# EAGLE board board-Panel (EAGLE 9.6.2), part 1 of 2
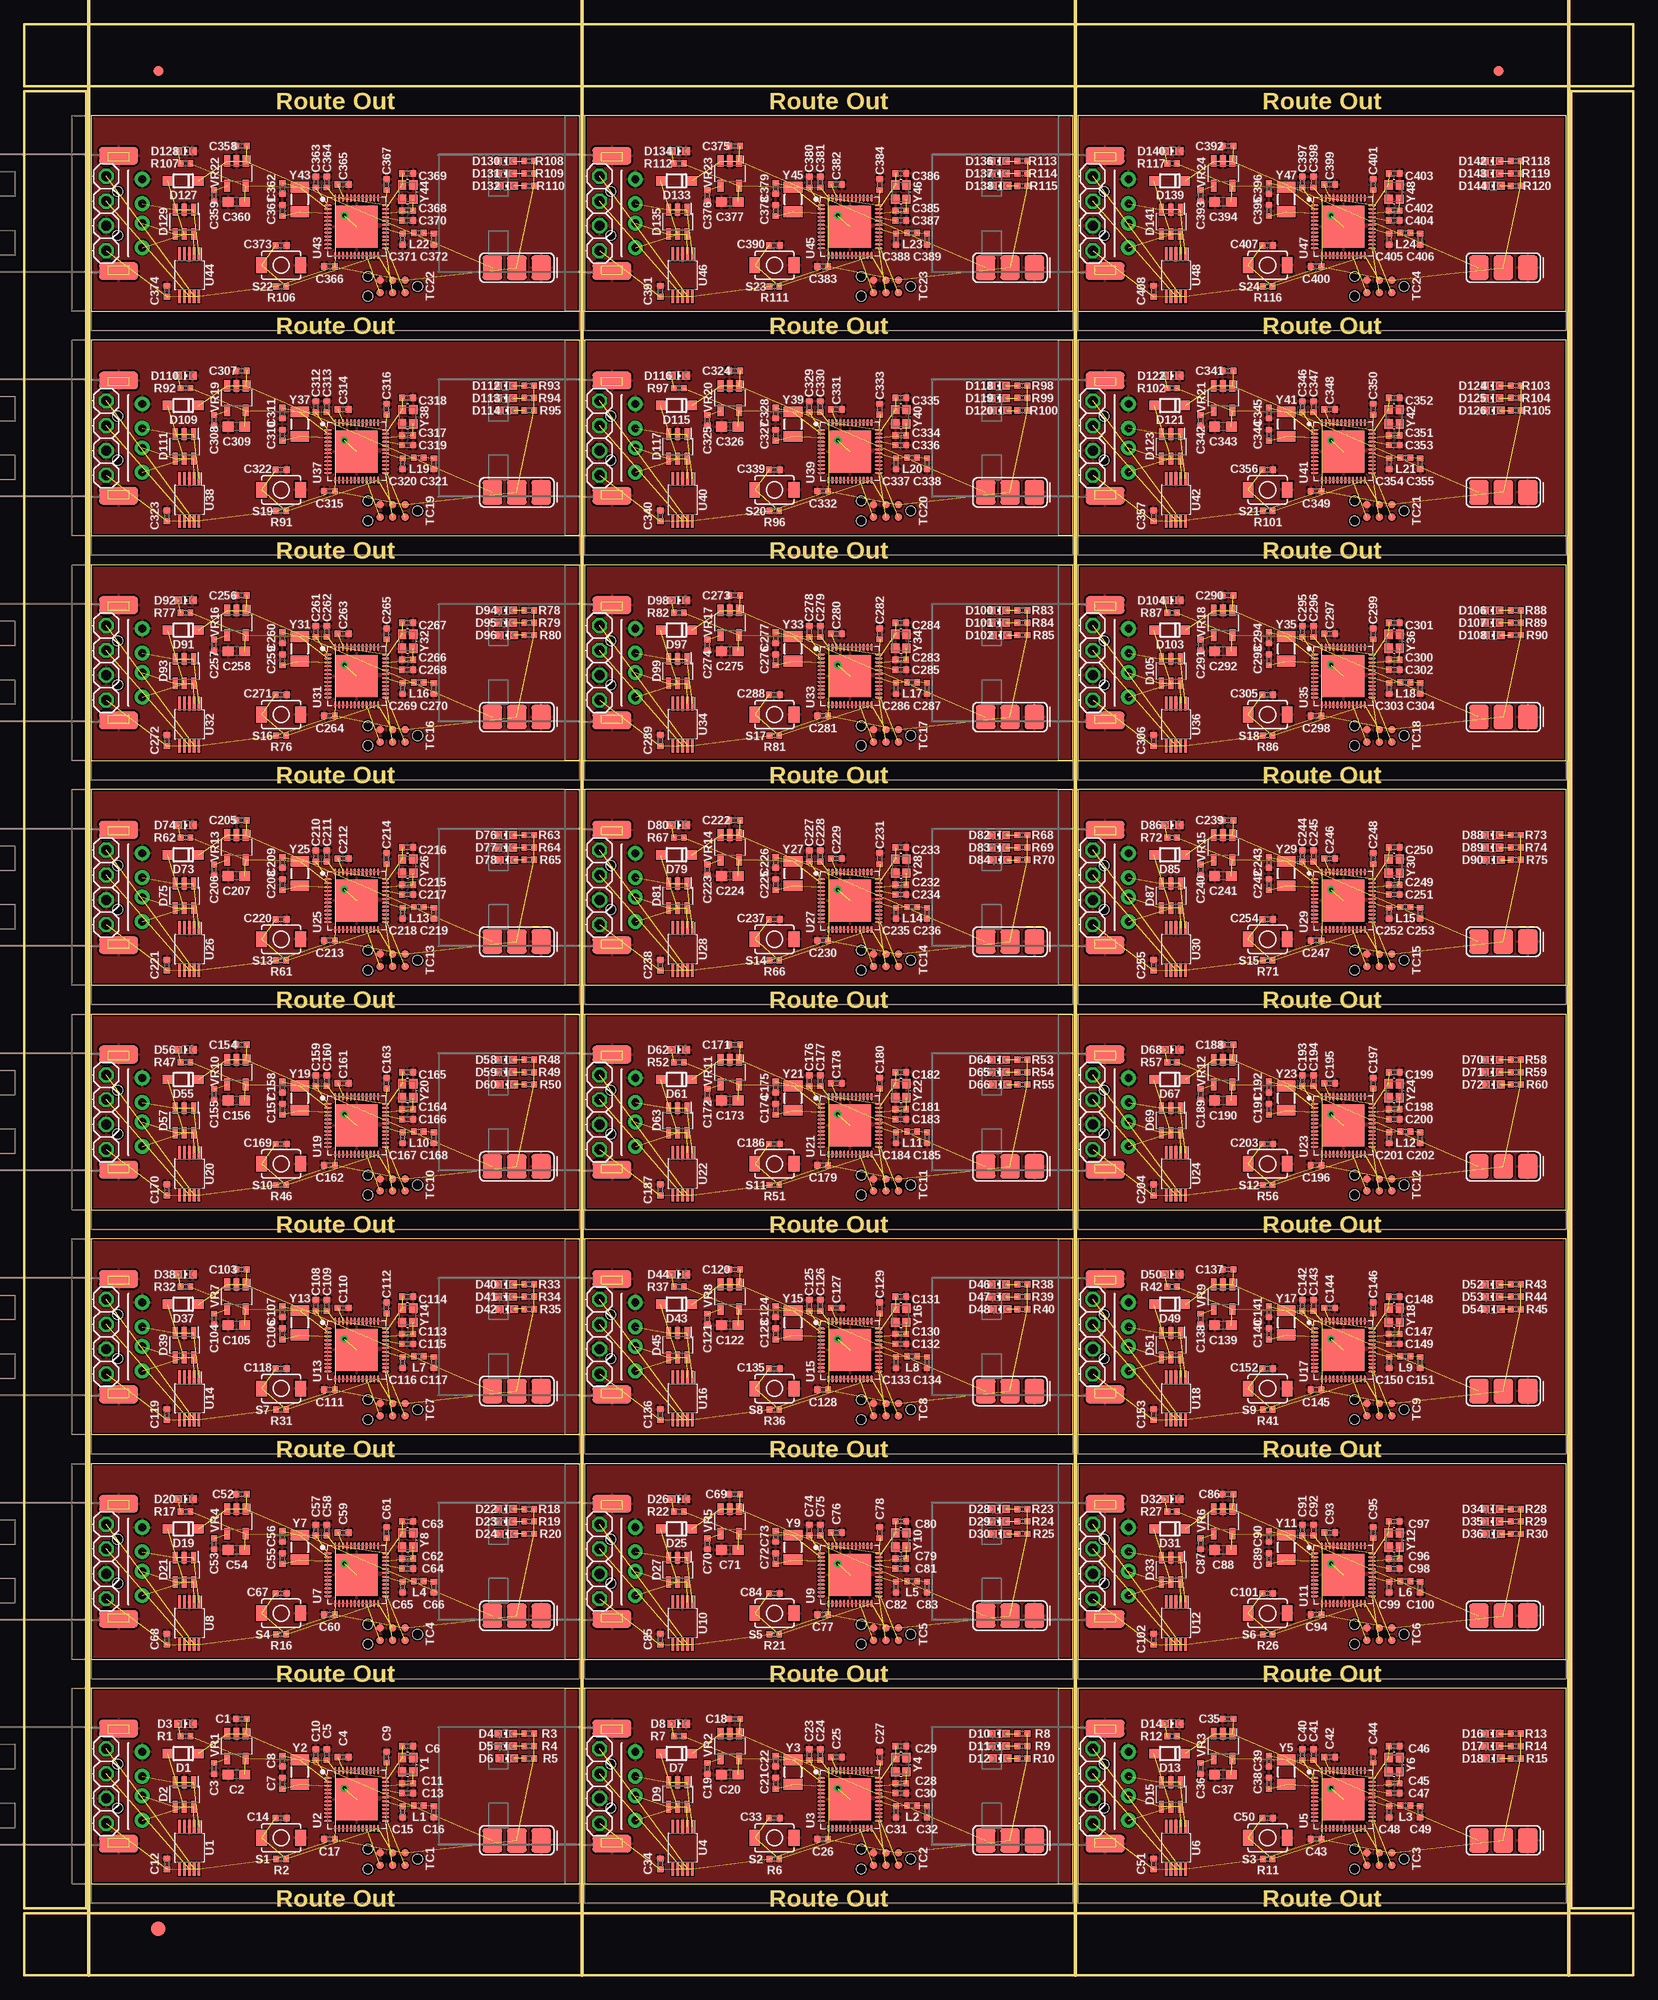
[diagram p0: board, top side]
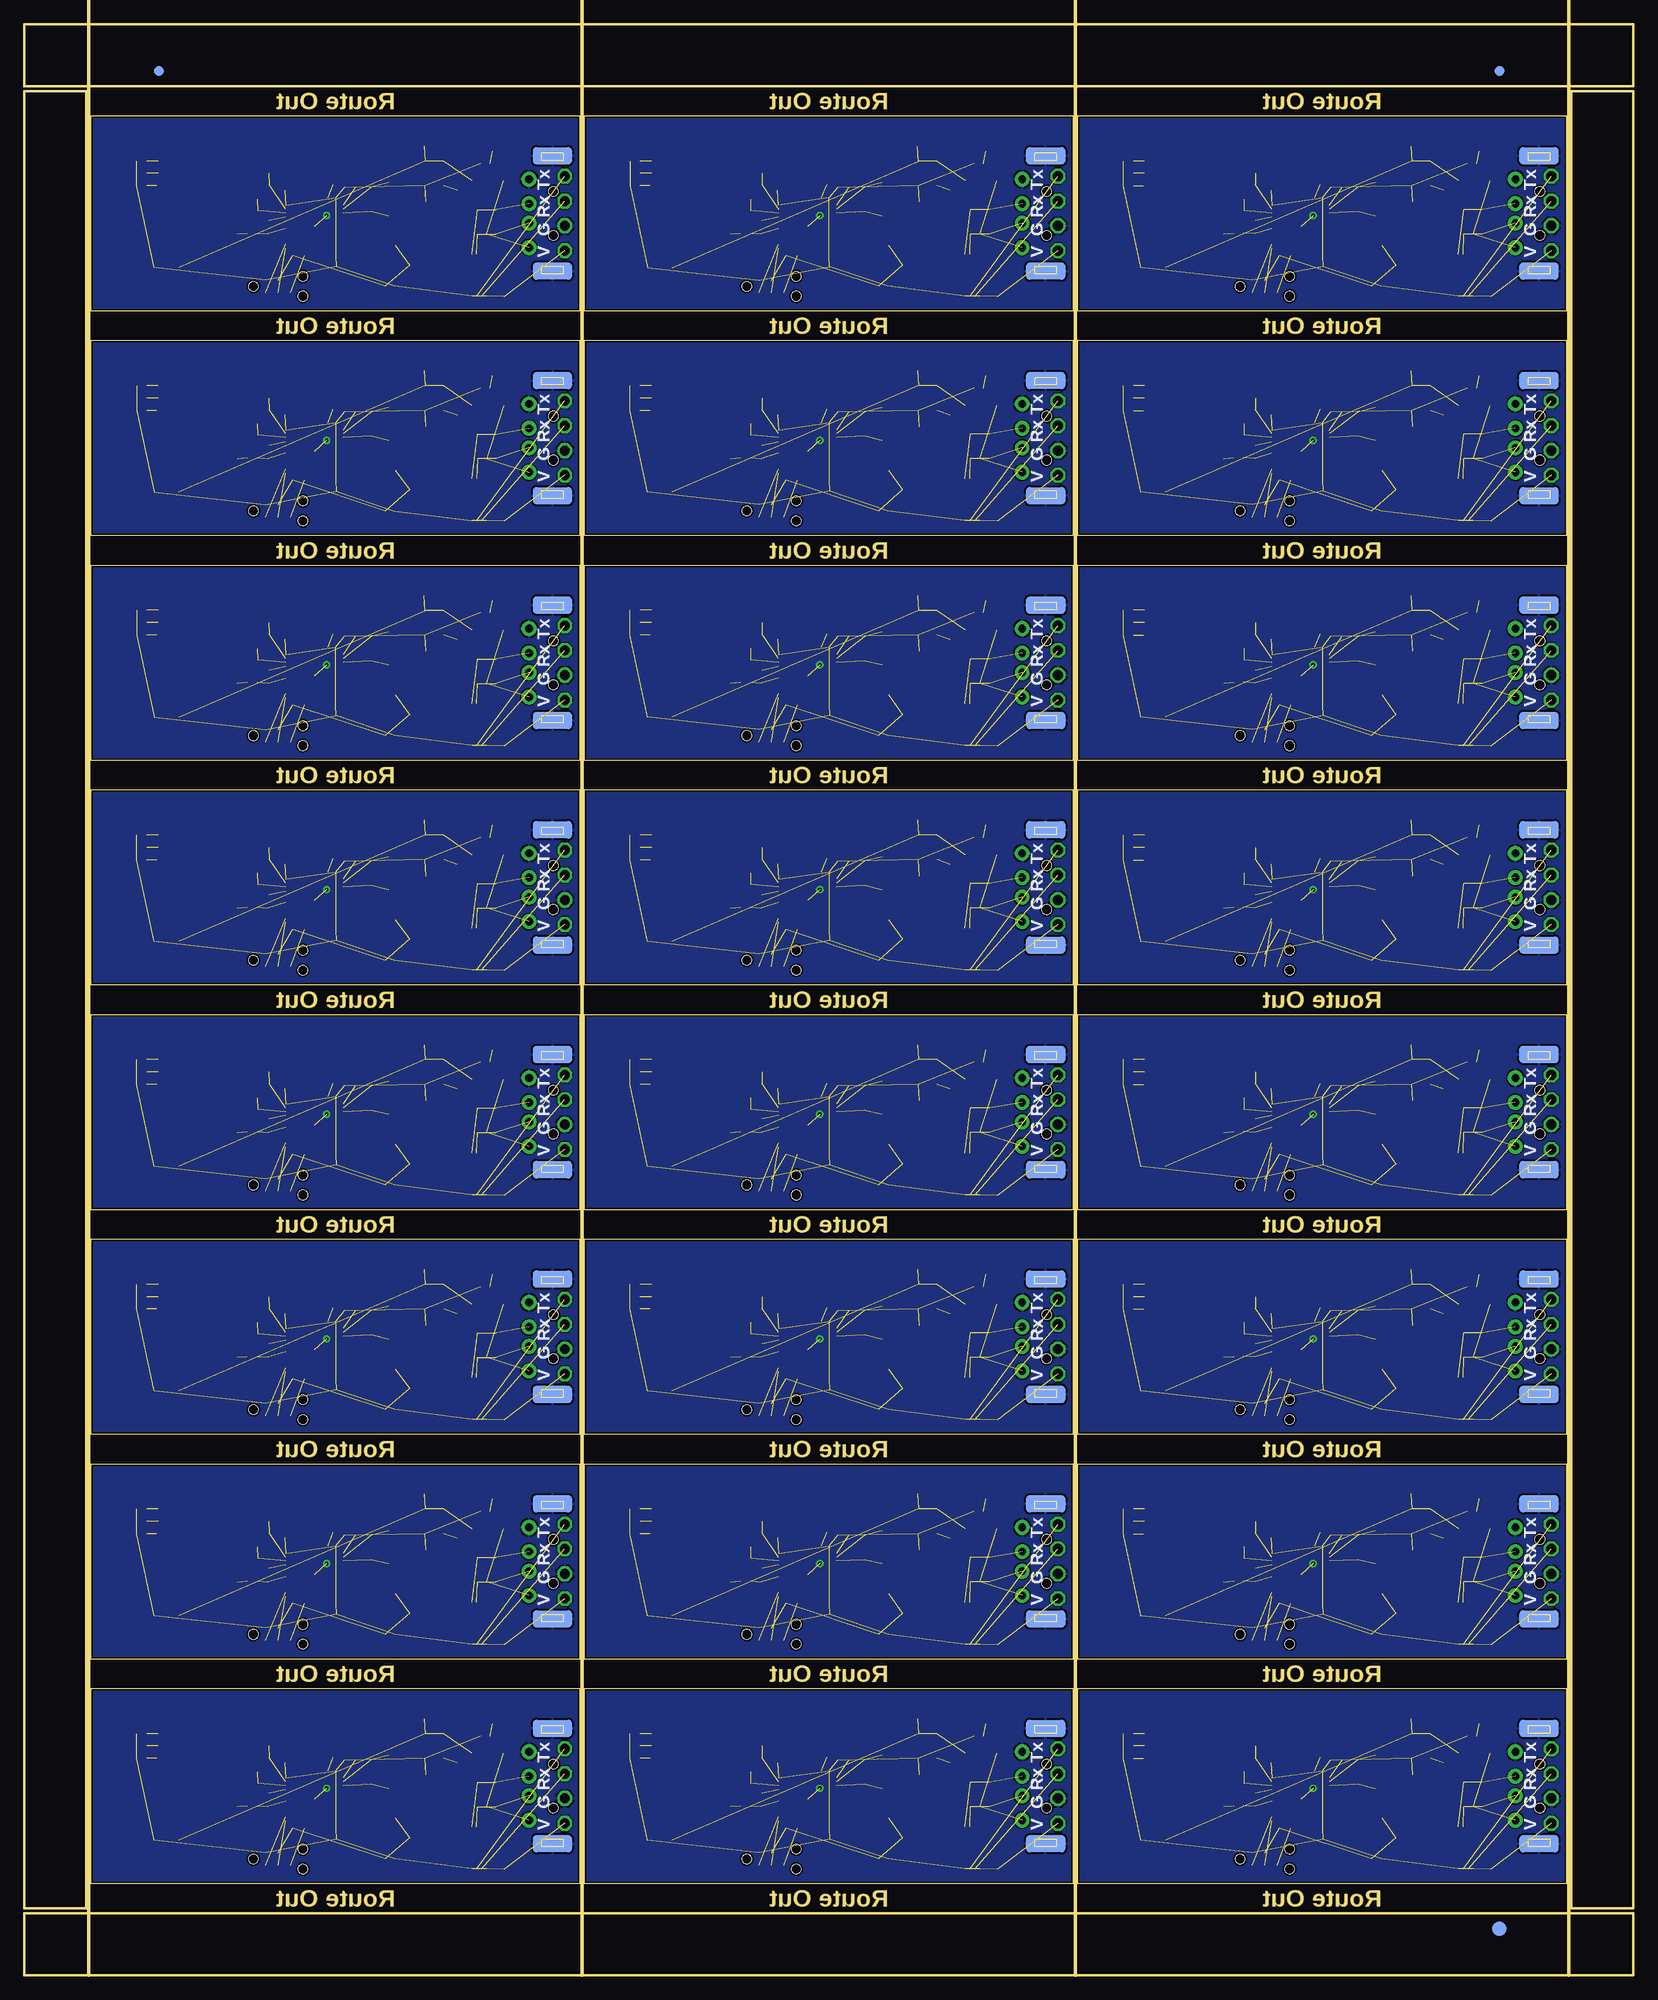
[diagram p1: board, bottom side, seen from below]

Size 164.7 x 199.7 mm. Coordinates in mm from the lower left corner, seen from the top.
Outline: 6.85,9.35 56.85,9.35 56.85,29.35 6.85,29.35 6.85,9.35
Outline: 57.35,9.35 107.35,9.35 107.35,29.35 57.35,29.35 57.35,9.35
Outline: 107.85,9.35 157.85,9.35 157.85,29.35 107.85,29.35 107.85,9.35
Outline: 6.85,32.35 56.85,32.35 56.85,52.35 6.85,52.35 6.85,32.35
Outline: 57.35,32.35 107.35,32.35 107.35,52.35 57.35,52.35 57.35,32.35
Outline: 107.85,32.35 157.85,32.35 157.85,52.35 107.85,52.35 107.85,32.35
Outline: 6.85,55.35 56.85,55.35 56.85,75.35 6.85,75.35 6.85,55.35
Outline: 57.35,55.35 107.35,55.35 107.35,75.35 57.35,75.35 57.35,55.35
Outline: 107.85,55.35 157.85,55.35 157.85,75.35 107.85,75.35 107.85,55.35
Outline: 6.85,78.35 56.85,78.35 56.85,98.35 6.85,98.35 6.85,78.35
Outline: 57.35,78.35 107.35,78.35 107.35,98.35 57.35,98.35 57.35,78.35
Outline: 107.85,78.35 157.85,78.35 157.85,98.35 107.85,98.35 107.85,78.35
Outline: 6.85,101.35 56.85,101.35 56.85,121.35 6.85,121.35 6.85,101.35
Outline: 57.35,101.35 107.35,101.35 107.35,121.35 57.35,121.35 57.35,101.35
Outline: 107.85,101.35 157.85,101.35 157.85,121.35 107.85,121.35 107.85,101.35
Outline: 6.85,124.35 56.85,124.35 56.85,144.35 6.85,144.35 6.85,124.35
Outline: 57.35,124.35 107.35,124.35 107.35,144.35 57.35,144.35 57.35,124.35
Outline: 107.85,124.35 157.85,124.35 157.85,144.35 107.85,144.35 107.85,124.35
Outline: 6.85,147.35 56.85,147.35 56.85,167.35 6.85,167.35 6.85,147.35
Outline: 57.35,147.35 107.35,147.35 107.35,167.35 57.35,167.35 57.35,147.35
Outline: 107.85,147.35 157.85,147.35 157.85,167.35 107.85,167.35 107.85,147.35
Outline: 6.85,170.35 56.85,170.35 56.85,190.35 6.85,190.35 6.85,170.35
Outline: 57.35,170.35 107.35,170.35 107.35,190.35 57.35,190.35 57.35,170.35
Outline: 107.85,170.35 157.85,170.35 157.85,190.35 107.85,190.35 107.85,170.35
Outline: 0,6.35 164.7,6.35 164.7,0 0,0 0,6.35
Outline: 158.35,192.84 164.7,192.84 164.7,6.86 158.35,6.86 158.35,192.84
Outline: 0,199.7 164.7,199.7 164.7,193.35 0,193.35 0,199.7
Outline: 0,192.84 6.35,192.84 6.35,6.86 0,6.86 0,192.84
Copper layers (1*16): Top 0.035mm / dielectric 1.5mm / Bottom 0.035mm
Design rules "board": minimum track width 0.13208125mm, minimum drill 0.2mm, track to track 0.13208125mm, track to pad 0.13208125mm, pad to pad 0.13208125mm, via to via 0.13208125mm, smd to smd 0.13208125mm, copper to edge 8mil, drill to drill 3mil, minimum pad ring 3mil, minimum via ring 0.2mm, stop-mask expansion 4mil, vias tented up to drill 15mil, thermal gap 8mil
Net classes: 0 default: width 0.203 mm; 1 power: width 0.305 mm; 2 RF: width 0.406 mm
Milling: 4 lines

## Footprints (pad centres in the part's own frame; a part is rotated, then mirrored left to right if it is on the bottom)
C0402 = smd 0.6 x 0.65: 1 -0.551,0; 2 0.551,0
C0603 = smd 1.1 x 1: 1 -0.85,0; 2 0.85,0
SOD-123 = smd 0.988 x 0.95: A 1.6,0; C -1.6,0
SPT-23-6 = smd 1.209 x 0.51: 1 -1.253,0.95; 2 -1.253,0; 3 -1.253,-0.95; 4 1.253,-0.95; 5 1.253,0; 6 1.253,0.95
LED_0603 = smd 0.8 x 0.8: A 0.75,0; C -0.75,0
FIDUCIAL-1X2 = smd 1 x 1: 1 0,0
FIDUCIAL-1.5X3 = smd 1.5 x 1.5: 1 0,0
USB-A-H-RECT = drill 0.8 pad 1.524: D+ 2.4,1; D- 2.4,-1; GND 2.4,3.5; VBUS 2.4,-3.5 | smd 4 x 1.8: SHIELD@0 0,5.9; SHIELD@1 0,-5.9 | smd 4 x 1.8 bottom: SHIELD@2 0,5.9; SHIELD@3 0,-5.9 | hole 1: -0.1,2.25; -0.1,-2.25
1X04/90 = drill 1.016 octagon: 1 -3.81,0; 2 -1.27,0; 3 1.27,0; 4 3.81,0
R0402 = smd 0.6 x 0.65: 1 -0.5,0; 2 0.5,0
TACTILE_SWITCH_SMD_3.0X4.0MM = smd 1.1 x 1.6: 1 -2,0; 2 2,0
TC2030-IDC-NL = smd 0.787 x 0.787: 1 -1.27,-0.635; 2 -1.27,0.635; 3 0,-0.635; 4 0,0.635; 5 1.27,-0.635; 6 1.27,0.635 | hole 0.991: -2.54,0; 2.54,1.016; 2.54,-1.016
PAD-3X-RECT-SILK = smd 2 x 2.5: P$1 -2.5,0; P$2 0,0; P$3 2.5,0
MSOP-10 = smd 1.412 x 0.272: 1 -2.15,1; 2 -2.15,0.5; 3 -2.15,0; 4 -2.15,-0.5; 5 -2.15,-1; 6 2.15,-1; 7 2.15,-0.5; 8 2.15,0; 9 2.15,0.5; 10 2.15,1
QFN40P600X600X90-49T450N = smd 0.811 x 0.22: 1 -2.951,2.2; 2 -2.951,1.8; 3 -2.951,1.4; 4 -2.951,1; 5 -2.951,0.6; 6 -2.951,0.2; 7 -2.951,-0.2; 8 -2.951,-0.6; 9 -2.951,-1; 10 -2.951,-1.4; 11 -2.951,-1.8; 12 -2.951,-2.2; 25 2.951,-2.2; 26 2.951,-1.8; 27 2.951,-1.4; 28 2.951,-1; 29 2.951,-0.6; 30 2.951,-0.2; 31 2.951,0.2; 32 2.951,0.6; 33 2.951,1; 34 2.951,1.4; 35 2.951,1.8; 36 2.951,2.2 | smd 0.22 x 0.811: 13 -2.2,-2.951; 14 -1.8,-2.951; 15 -1.4,-2.951; 16 -1,-2.951; 17 -0.6,-2.951; 18 -0.2,-2.951; 19 0.2,-2.951; 20 0.6,-2.951; 21 1,-2.951; 22 1.4,-2.951; 23 1.8,-2.951; 24 2.2,-2.951; 37 2.2,2.951; 38 1.8,2.951; 39 1.4,2.951; 40 1,2.951; 41 0.6,2.951; 42 0.2,2.951; 43 -0.2,2.951; 44 -0.6,2.951; 45 -1,2.951; 46 -1.4,2.951; 47 -1.8,2.951; 48 -2.2,2.951 | smd 4.3 x 4.3: 49 0,0
SOT-23-5 = smd 1.189 x 0.589: 1 -1.264,0.95; 2 -1.264,0; 3 -1.264,-0.95; 4 1.264,-0.95; 5 1.264,0.95
CRYSTAL-SMD-2.0X1.6MM = smd 0.95 x 0.85: 1 -0.725,-0.575; 2 0.725,-0.575; 3 0.725,0.575; 4 -0.725,0.575
CRYSTAL-SMD-3.2X1.5MM = smd 1.1 x 1.9: P$1 -1.25,0; P$2 1.25,0

## Placement (x,y rotation side)
C1  1uF  [C0402]  22.22,26.24 180 top
C2  2.2uF  [C0603]  21.71,20.53 180 top
C3  100nF  [C0402]  19.42,21.16 270 top
C4  100nF  [C0402]  32.63,22.3 0 top
C5  4.7uF  [C0402]  30.98,22.56 90 top
C6  12pF  [C0402]  39.24,23.45 0 top
C7  12pF  [C0402]  26.41,19.64 270 top
C8  12pF  [C0402]  26.41,21.92 90 top
C9  100nF  [C0402]  37.08,22.3 90 top
C10  100nF  [C0402]  29.84,22.56 90 top
C11  12pF  [C0402]  39.24,19.64 180 top
C12  100nF  [C0402]  14.6,11.38 90 top
C13  100pF  [C0402]  39.24,18.62 0 top
C14  1uF  [C0402]  26.28,16.08 0 top
C15  0.8pF  [C0402]  38.73,16.72 270 top
C16  0.8pF  [C0402]  41.9,16.72 270 top
C17  100nF  [C0402]  31.23,13.92 180 top
C18  1uF  [C0402]  72.72,26.24 180 top
C19  100nF  [C0402]  69.92,21.16 270 top
C20  2.2uF  [C0603]  72.21,20.53 180 top
C21  12pF  [C0402]  76.91,19.64 270 top
C22  12pF  [C0402]  76.91,21.92 90 top
C23  100nF  [C0402]  80.34,22.56 90 top
C24  4.7uF  [C0402]  81.48,22.56 90 top
C25  100nF  [C0402]  83.13,22.3 0 top
C26  100nF  [C0402]  81.73,13.92 180 top
C27  100nF  [C0402]  87.58,22.3 90 top
C28  12pF  [C0402]  89.74,19.64 180 top
C29  12pF  [C0402]  89.74,23.45 0 top
C30  100pF  [C0402]  89.74,18.62 0 top
C31  0.8pF  [C0402]  89.23,16.72 270 top
C32  0.8pF  [C0402]  92.4,16.72 270 top
C33  1uF  [C0402]  76.78,16.08 0 top
C34  100nF  [C0402]  65.1,11.38 90 top
C35  1uF  [C0402]  123.22,26.24 180 top
C36  100nF  [C0402]  120.42,21.16 270 top
C37  2.2uF  [C0603]  122.71,20.53 180 top
C38  12pF  [C0402]  127.41,19.64 270 top
C39  12pF  [C0402]  127.41,21.92 90 top
C40  100nF  [C0402]  130.84,22.56 90 top
C41  4.7uF  [C0402]  131.98,22.56 90 top
C42  100nF  [C0402]  133.63,22.3 0 top
C43  100nF  [C0402]  132.23,13.92 180 top
C44  100nF  [C0402]  138.08,22.3 90 top
C45  12pF  [C0402]  140.24,19.64 180 top
C46  12pF  [C0402]  140.24,23.45 0 top
C47  100pF  [C0402]  140.24,18.62 0 top
C48  0.8pF  [C0402]  139.73,16.72 270 top
C49  0.8pF  [C0402]  142.9,16.72 270 top
C50  1uF  [C0402]  127.28,16.08 0 top
C51  100nF  [C0402]  115.6,11.38 90 top
C52  1uF  [C0402]  22.22,49.24 180 top
C53  100nF  [C0402]  19.42,44.16 270 top
C54  2.2uF  [C0603]  21.71,43.53 180 top
C55  12pF  [C0402]  26.41,42.64 270 top
C56  12pF  [C0402]  26.41,44.92 90 top
C57  100nF  [C0402]  29.84,45.56 90 top
C58  4.7uF  [C0402]  30.98,45.56 90 top
C59  100nF  [C0402]  32.63,45.3 0 top
C60  100nF  [C0402]  31.23,36.92 180 top
C61  100nF  [C0402]  37.08,45.3 90 top
C62  12pF  [C0402]  39.24,42.64 180 top
C63  12pF  [C0402]  39.24,46.45 0 top
C64  100pF  [C0402]  39.24,41.62 0 top
C65  0.8pF  [C0402]  38.73,39.72 270 top
C66  0.8pF  [C0402]  41.9,39.72 270 top
C67  1uF  [C0402]  26.28,39.08 0 top
C68  100nF  [C0402]  14.6,34.38 90 top
C69  1uF  [C0402]  72.72,49.24 180 top
C70  100nF  [C0402]  69.92,44.16 270 top
C71  2.2uF  [C0603]  72.21,43.53 180 top
C72  12pF  [C0402]  76.91,42.64 270 top
C73  12pF  [C0402]  76.91,44.92 90 top
C74  100nF  [C0402]  80.34,45.56 90 top
C75  4.7uF  [C0402]  81.48,45.56 90 top
C76  100nF  [C0402]  83.13,45.3 0 top
C77  100nF  [C0402]  81.73,36.92 180 top
C78  100nF  [C0402]  87.58,45.3 90 top
C79  12pF  [C0402]  89.74,42.64 180 top
C80  12pF  [C0402]  89.74,46.45 0 top
C81  100pF  [C0402]  89.74,41.62 0 top
C82  0.8pF  [C0402]  89.23,39.72 270 top
C83  0.8pF  [C0402]  92.4,39.72 270 top
C84  1uF  [C0402]  76.78,39.08 0 top
C85  100nF  [C0402]  65.1,34.38 90 top
C86  1uF  [C0402]  123.22,49.24 180 top
C87  100nF  [C0402]  120.42,44.16 270 top
C88  2.2uF  [C0603]  122.71,43.53 180 top
C89  12pF  [C0402]  127.41,42.64 270 top
C90  12pF  [C0402]  127.41,44.92 90 top
C91  100nF  [C0402]  130.84,45.56 90 top
C92  4.7uF  [C0402]  131.98,45.56 90 top
C93  100nF  [C0402]  133.63,45.3 0 top
C94  100nF  [C0402]  132.23,36.92 180 top
C95  100nF  [C0402]  138.08,45.3 90 top
C96  12pF  [C0402]  140.24,42.64 180 top
C97  12pF  [C0402]  140.24,46.45 0 top
C98  100pF  [C0402]  140.24,41.62 0 top
C99  0.8pF  [C0402]  139.73,39.72 270 top
C100  0.8pF  [C0402]  142.9,39.72 270 top
C101  1uF  [C0402]  127.28,39.08 0 top
C102  100nF  [C0402]  115.6,34.38 90 top
C103  1uF  [C0402]  22.22,72.24 180 top
C104  100nF  [C0402]  19.42,67.16 270 top
C105  2.2uF  [C0603]  21.71,66.53 180 top
C106  12pF  [C0402]  26.41,65.64 270 top
C107  12pF  [C0402]  26.41,67.92 90 top
C108  100nF  [C0402]  29.84,68.56 90 top
C109  4.7uF  [C0402]  30.98,68.56 90 top
C110  100nF  [C0402]  32.63,68.3 0 top
C111  100nF  [C0402]  31.23,59.92 180 top
C112  100nF  [C0402]  37.08,68.3 90 top
C113  12pF  [C0402]  39.24,65.64 180 top
C114  12pF  [C0402]  39.24,69.45 0 top
C115  100pF  [C0402]  39.24,64.62 0 top
C116  0.8pF  [C0402]  38.73,62.72 270 top
C117  0.8pF  [C0402]  41.9,62.72 270 top
C118  1uF  [C0402]  26.28,62.08 0 top
C119  100nF  [C0402]  14.6,57.38 90 top
C120  1uF  [C0402]  72.72,72.24 180 top
C121  100nF  [C0402]  69.92,67.16 270 top
C122  2.2uF  [C0603]  72.21,66.53 180 top
C123  12pF  [C0402]  76.91,65.64 270 top
C124  12pF  [C0402]  76.91,67.92 90 top
C125  100nF  [C0402]  80.34,68.56 90 top
C126  4.7uF  [C0402]  81.48,68.56 90 top
C127  100nF  [C0402]  83.13,68.3 0 top
C128  100nF  [C0402]  81.73,59.92 180 top
C129  100nF  [C0402]  87.58,68.3 90 top
C130  12pF  [C0402]  89.74,65.64 180 top
C131  12pF  [C0402]  89.74,69.45 0 top
C132  100pF  [C0402]  89.74,64.62 0 top
C133  0.8pF  [C0402]  89.23,62.72 270 top
C134  0.8pF  [C0402]  92.4,62.72 270 top
C135  1uF  [C0402]  76.78,62.08 0 top
C136  100nF  [C0402]  65.1,57.38 90 top
C137  1uF  [C0402]  123.22,72.24 180 top
C138  100nF  [C0402]  120.42,67.16 270 top
C139  2.2uF  [C0603]  122.71,66.53 180 top
C140  12pF  [C0402]  127.41,65.64 270 top
C141  12pF  [C0402]  127.41,67.92 90 top
C142  100nF  [C0402]  130.84,68.56 90 top
C143  4.7uF  [C0402]  131.98,68.56 90 top
C144  100nF  [C0402]  133.63,68.3 0 top
C145  100nF  [C0402]  132.23,59.92 180 top
C146  100nF  [C0402]  138.08,68.3 90 top
C147  12pF  [C0402]  140.24,65.64 180 top
C148  12pF  [C0402]  140.24,69.45 0 top
C149  100pF  [C0402]  140.24,64.62 0 top
C150  0.8pF  [C0402]  139.73,62.72 270 top
C151  0.8pF  [C0402]  142.9,62.72 270 top
C152  1uF  [C0402]  127.28,62.08 0 top
C153  100nF  [C0402]  115.6,57.38 90 top
C154  1uF  [C0402]  22.22,95.24 180 top
C155  100nF  [C0402]  19.42,90.16 270 top
C156  2.2uF  [C0603]  21.71,89.52 180 top
C157  12pF  [C0402]  26.41,88.64 270 top
C158  12pF  [C0402]  26.41,90.92 90 top
C159  100nF  [C0402]  29.84,91.56 90 top
C160  4.7uF  [C0402]  30.98,91.56 90 top
C161  100nF  [C0402]  32.63,91.3 0 top
C162  100nF  [C0402]  31.23,82.92 180 top
C163  100nF  [C0402]  37.08,91.3 90 top
C164  12pF  [C0402]  39.24,88.64 180 top
C165  12pF  [C0402]  39.24,92.45 0 top
C166  100pF  [C0402]  39.24,87.62 0 top
C167  0.8pF  [C0402]  38.73,85.71 270 top
C168  0.8pF  [C0402]  41.9,85.71 270 top
C169  1uF  [C0402]  26.28,85.08 0 top
C170  100nF  [C0402]  14.6,80.38 90 top
C171  1uF  [C0402]  72.72,95.24 180 top
C172  100nF  [C0402]  69.92,90.16 270 top
C173  2.2uF  [C0603]  72.21,89.52 180 top
C174  12pF  [C0402]  76.91,88.64 270 top
C175  12pF  [C0402]  76.91,90.92 90 top
C176  100nF  [C0402]  80.34,91.56 90 top
C177  4.7uF  [C0402]  81.48,91.56 90 top
C178  100nF  [C0402]  83.13,91.3 0 top
C179  100nF  [C0402]  81.73,82.92 180 top
C180  100nF  [C0402]  87.58,91.3 90 top
C181  12pF  [C0402]  89.74,88.64 180 top
C182  12pF  [C0402]  89.74,92.45 0 top
C183  100pF  [C0402]  89.74,87.62 0 top
C184  0.8pF  [C0402]  89.23,85.71 270 top
C185  0.8pF  [C0402]  92.4,85.71 270 top
C186  1uF  [C0402]  76.78,85.08 0 top
C187  100nF  [C0402]  65.1,80.38 90 top
C188  1uF  [C0402]  123.22,95.24 180 top
C189  100nF  [C0402]  120.42,90.16 270 top
C190  2.2uF  [C0603]  122.71,89.52 180 top
C191  12pF  [C0402]  127.41,88.64 270 top
C192  12pF  [C0402]  127.41,90.92 90 top
C193  100nF  [C0402]  130.84,91.56 90 top
C194  4.7uF  [C0402]  131.98,91.56 90 top
C195  100nF  [C0402]  133.63,91.3 0 top
C196  100nF  [C0402]  132.23,82.92 180 top
C197  100nF  [C0402]  138.08,91.3 90 top
C198  12pF  [C0402]  140.24,88.64 180 top
C199  12pF  [C0402]  140.24,92.45 0 top
C200  100pF  [C0402]  140.24,87.62 0 top
C201  0.8pF  [C0402]  139.73,85.71 270 top
C202  0.8pF  [C0402]  142.9,85.71 270 top
C203  1uF  [C0402]  127.28,85.08 0 top
C204  100nF  [C0402]  115.6,80.38 90 top
C205  1uF  [C0402]  22.22,118.24 180 top
C206  100nF  [C0402]  19.42,113.16 270 top
C207  2.2uF  [C0603]  21.71,112.52 180 top
C208  12pF  [C0402]  26.41,111.64 270 top
C209  12pF  [C0402]  26.41,113.92 90 top
C210  100nF  [C0402]  29.84,114.56 90 top
C211  4.7uF  [C0402]  30.98,114.56 90 top
C212  100nF  [C0402]  32.63,114.3 0 top
C213  100nF  [C0402]  31.23,105.92 180 top
C214  100nF  [C0402]  37.08,114.3 90 top
C215  12pF  [C0402]  39.24,111.64 180 top
C216  12pF  [C0402]  39.24,115.45 0 top
C217  100pF  [C0402]  39.24,110.62 0 top
C218  0.8pF  [C0402]  38.73,108.71 270 top
C219  0.8pF  [C0402]  41.9,108.71 270 top
C220  1uF  [C0402]  26.28,108.08 0 top
C221  100nF  [C0402]  14.6,103.38 90 top
C222  1uF  [C0402]  72.72,118.24 180 top
C223  100nF  [C0402]  69.92,113.16 270 top
C224  2.2uF  [C0603]  72.21,112.52 180 top
C225  12pF  [C0402]  76.91,111.64 270 top
C226  12pF  [C0402]  76.91,113.92 90 top
C227  100nF  [C0402]  80.34,114.56 90 top
C228  4.7uF  [C0402]  81.48,114.56 90 top
C229  100nF  [C0402]  83.13,114.3 0 top
C230  100nF  [C0402]  81.73,105.92 180 top
C231  100nF  [C0402]  87.58,114.3 90 top
C232  12pF  [C0402]  89.74,111.64 180 top
C233  12pF  [C0402]  89.74,115.45 0 top
C234  100pF  [C0402]  89.74,110.62 0 top
C235  0.8pF  [C0402]  89.23,108.71 270 top
C236  0.8pF  [C0402]  92.4,108.71 270 top
C237  1uF  [C0402]  76.78,108.08 0 top
C238  100nF  [C0402]  65.1,103.38 90 top
C239  1uF  [C0402]  123.22,118.24 180 top
C240  100nF  [C0402]  120.42,113.16 270 top
C241  2.2uF  [C0603]  122.71,112.52 180 top
C242  12pF  [C0402]  127.41,111.64 270 top
C243  12pF  [C0402]  127.41,113.92 90 top
C244  100nF  [C0402]  130.84,114.56 90 top
C245  4.7uF  [C0402]  131.98,114.56 90 top
C246  100nF  [C0402]  133.63,114.3 0 top
C247  100nF  [C0402]  132.23,105.92 180 top
C248  100nF  [C0402]  138.08,114.3 90 top
C249  12pF  [C0402]  140.24,111.64 180 top
C250  12pF  [C0402]  140.24,115.45 0 top
C251  100pF  [C0402]  140.24,110.62 0 top
C252  0.8pF  [C0402]  139.73,108.71 270 top
C253  0.8pF  [C0402]  142.9,108.71 270 top
C254  1uF  [C0402]  127.28,108.08 0 top
C255  100nF  [C0402]  115.6,103.38 90 top
C256  1uF  [C0402]  22.22,141.24 180 top
C257  100nF  [C0402]  19.42,136.16 270 top
C258  2.2uF  [C0603]  21.71,135.53 180 top
C259  12pF  [C0402]  26.41,134.64 270 top
C260  12pF  [C0402]  26.41,136.92 90 top
C261  100nF  [C0402]  29.84,137.56 90 top
C262  4.7uF  [C0402]  30.98,137.56 90 top
C263  100nF  [C0402]  32.63,137.3 0 top
C264  100nF  [C0402]  31.23,128.92 180 top
C265  100nF  [C0402]  37.08,137.3 90 top
C266  12pF  [C0402]  39.24,134.64 180 top
C267  12pF  [C0402]  39.24,138.45 0 top
C268  100pF  [C0402]  39.24,133.62 0 top
C269  0.8pF  [C0402]  38.73,131.72 270 top
C270  0.8pF  [C0402]  41.9,131.72 270 top
C271  1uF  [C0402]  26.28,131.08 0 top
C272  100nF  [C0402]  14.6,126.38 90 top
C273  1uF  [C0402]  72.72,141.24 180 top
C274  100nF  [C0402]  69.92,136.16 270 top
C275  2.2uF  [C0603]  72.21,135.53 180 top
C276  12pF  [C0402]  76.91,134.64 270 top
C277  12pF  [C0402]  76.91,136.92 90 top
C278  100nF  [C0402]  80.34,137.56 90 top
C279  4.7uF  [C0402]  81.48,137.56 90 top
C280  100nF  [C0402]  83.13,137.3 0 top
C281  100nF  [C0402]  81.73,128.92 180 top
C282  100nF  [C0402]  87.58,137.3 90 top
C283  12pF  [C0402]  89.74,134.64 180 top
C284  12pF  [C0402]  89.74,138.45 0 top
C285  100pF  [C0402]  89.74,133.62 0 top
C286  0.8pF  [C0402]  89.23,131.72 270 top
C287  0.8pF  [C0402]  92.4,131.72 270 top
C288  1uF  [C0402]  76.78,131.08 0 top
C289  100nF  [C0402]  65.1,126.38 90 top
C290  1uF  [C0402]  123.22,141.24 180 top
C291  100nF  [C0402]  120.42,136.16 270 top
C292  2.2uF  [C0603]  122.71,135.53 180 top
C293  12pF  [C0402]  127.41,134.64 270 top
C294  12pF  [C0402]  127.41,136.92 90 top
C295  100nF  [C0402]  130.84,137.56 90 top
C296  4.7uF  [C0402]  131.98,137.56 90 top
C297  100nF  [C0402]  133.63,137.3 0 top
C298  100nF  [C0402]  132.23,128.92 180 top
C299  100nF  [C0402]  138.08,137.3 90 top
C300  12pF  [C0402]  140.24,134.64 180 top
C301  12pF  [C0402]  140.24,138.45 0 top
C302  100pF  [C0402]  140.24,133.62 0 top
C303  0.8pF  [C0402]  139.73,131.72 270 top
C304  0.8pF  [C0402]  142.9,131.72 270 top
C305  1uF  [C0402]  127.28,131.08 0 top
C306  100nF  [C0402]  115.6,126.38 90 top
C307  1uF  [C0402]  22.22,164.24 180 top
C308  100nF  [C0402]  19.42,159.16 270 top
C309  2.2uF  [C0603]  21.71,158.53 180 top
C310  12pF  [C0402]  26.41,157.64 270 top
C311  12pF  [C0402]  26.41,159.92 90 top
C312  100nF  [C0402]  29.84,160.56 90 top
C313  4.7uF  [C0402]  30.98,160.56 90 top
C314  100nF  [C0402]  32.63,160.3 0 top
C315  100nF  [C0402]  31.23,151.92 180 top
C316  100nF  [C0402]  37.08,160.3 90 top
C317  12pF  [C0402]  39.24,157.64 180 top
C318  12pF  [C0402]  39.24,161.45 0 top
C319  100pF  [C0402]  39.24,156.62 0 top
C320  0.8pF  [C0402]  38.73,154.72 270 top
C321  0.8pF  [C0402]  41.9,154.72 270 top
C322  1uF  [C0402]  26.28,154.08 0 top
C323  100nF  [C0402]  14.6,149.38 90 top
C324  1uF  [C0402]  72.72,164.24 180 top
C325  100nF  [C0402]  69.92,159.16 270 top
C326  2.2uF  [C0603]  72.21,158.53 180 top
C327  12pF  [C0402]  76.91,157.64 270 top
C328  12pF  [C0402]  76.91,159.92 90 top
C329  100nF  [C0402]  80.34,160.56 90 top
C330  4.7uF  [C0402]  81.48,160.56 90 top
C331  100nF  [C0402]  83.13,160.3 0 top
C332  100nF  [C0402]  81.73,151.92 180 top
C333  100nF  [C0402]  87.58,160.3 90 top
C334  12pF  [C0402]  89.74,157.64 180 top
C335  12pF  [C0402]  89.74,161.45 0 top
C336  100pF  [C0402]  89.74,156.62 0 top
C337  0.8pF  [C0402]  89.23,154.72 270 top
C338  0.8pF  [C0402]  92.4,154.72 270 top
C339  1uF  [C0402]  76.78,154.08 0 top
C340  100nF  [C0402]  65.1,149.38 90 top
C341  1uF  [C0402]  123.22,164.24 180 top
C342  100nF  [C0402]  120.42,159.16 270 top
C343  2.2uF  [C0603]  122.71,158.53 180 top
C344  12pF  [C0402]  127.41,157.64 270 top
C345  12pF  [C0402]  127.41,159.92 90 top
C346  100nF  [C0402]  130.84,160.56 90 top
C347  4.7uF  [C0402]  131.98,160.56 90 top
C348  100nF  [C0402]  133.63,160.3 0 top
C349  100nF  [C0402]  132.23,151.92 180 top
C350  100nF  [C0402]  138.08,160.3 90 top
C351  12pF  [C0402]  140.24,157.64 180 top
C352  12pF  [C0402]  140.24,161.45 0 top
C353  100pF  [C0402]  140.24,156.62 0 top
C354  0.8pF  [C0402]  139.73,154.72 270 top
C355  0.8pF  [C0402]  142.9,154.72 270 top
C356  1uF  [C0402]  127.28,154.08 0 top
C357  100nF  [C0402]  115.6,149.38 90 top
C358  1uF  [C0402]  22.22,187.24 180 top
C359  100nF  [C0402]  19.42,182.16 270 top
C360  2.2uF  [C0603]  21.71,181.53 180 top
C361  12pF  [C0402]  26.41,180.64 270 top
C362  12pF  [C0402]  26.41,182.92 90 top
C363  100nF  [C0402]  29.84,183.56 90 top
C364  4.7uF  [C0402]  30.98,183.56 90 top
C365  100nF  [C0402]  32.63,183.3 0 top
C366  100nF  [C0402]  31.23,174.92 180 top
C367  100nF  [C0402]  37.08,183.3 90 top
C368  12pF  [C0402]  39.24,180.64 180 top
C369  12pF  [C0402]  39.24,184.45 0 top
C370  100pF  [C0402]  39.24,179.62 0 top
C371  0.8pF  [C0402]  38.73,177.72 270 top
C372  0.8pF  [C0402]  41.9,177.72 270 top
C373  1uF  [C0402]  26.28,177.08 0 top
C374  100nF  [C0402]  14.6,172.38 90 top
C375  1uF  [C0402]  72.72,187.24 180 top
C376  100nF  [C0402]  69.92,182.16 270 top
C377  2.2uF  [C0603]  72.21,181.53 180 top
C378  12pF  [C0402]  76.91,180.64 270 top
C379  12pF  [C0402]  76.91,182.92 90 top
C380  100nF  [C0402]  80.34,183.56 90 top
C381  4.7uF  [C0402]  81.48,183.56 90 top
C382  100nF  [C0402]  83.13,183.3 0 top
C383  100nF  [C0402]  81.73,174.92 180 top
C384  100nF  [C0402]  87.58,183.3 90 top
C385  12pF  [C0402]  89.74,180.64 180 top
C386  12pF  [C0402]  89.74,184.45 0 top
C387  100pF  [C0402]  89.74,179.62 0 top
C388  0.8pF  [C0402]  89.23,177.72 270 top
C389  0.8pF  [C0402]  92.4,177.72 270 top
C390  1uF  [C0402]  76.78,177.08 0 top
C391  100nF  [C0402]  65.1,172.38 90 top
C392  1uF  [C0402]  123.22,187.24 180 top
C393  100nF  [C0402]  120.42,182.16 270 top
C394  2.2uF  [C0603]  122.71,181.53 180 top
C395  12pF  [C0402]  127.41,180.64 270 top
C396  12pF  [C0402]  127.41,182.92 90 top
C397  100nF  [C0402]  130.84,183.56 90 top
C398  4.7uF  [C0402]  131.98,183.56 90 top
C399  100nF  [C0402]  133.63,183.3 0 top
C400  100nF  [C0402]  132.23,174.92 180 top
C401  100nF  [C0402]  138.08,183.3 90 top
C402  12pF  [C0402]  140.24,180.64 180 top
C403  12pF  [C0402]  140.24,184.45 0 top
C404  100pF  [C0402]  140.24,179.62 0 top
C405  0.8pF  [C0402]  139.73,177.72 270 top
C406  0.8pF  [C0402]  142.9,177.72 270 top
C407  1uF  [C0402]  127.28,177.08 0 top
C408  100nF  [C0402]  115.6,172.38 90 top
D1  B5819W  [SOD-123]  16.25,22.68 180 top
D2  TVS  [SPT-23-6]  16.38,18.49 270 top
D3  0603  [LED_0603]  16.5,25.73 180 top
D4  0603  [LED_0603]  49.27,24.72 0 top
D5  0603  [LED_0603]  49.27,23.45 0 top
D6  0603  [LED_0603]  49.4,22.18 0 top
D7  B5819W  [SOD-123]  66.75,22.68 180 top
D8  0603  [LED_0603]  67,25.73 180 top
D9  TVS  [SPT-23-6]  66.88,18.49 270 top
D10  0603  [LED_0603]  99.77,24.72 0 top
D11  0603  [LED_0603]  99.77,23.45 0 top
D12  0603  [LED_0603]  99.9,22.18 0 top
D13  B5819W  [SOD-123]  117.25,22.68 180 top
D14  0603  [LED_0603]  117.5,25.73 180 top
D15  TVS  [SPT-23-6]  117.38,18.49 270 top
D16  0603  [LED_0603]  150.27,24.72 0 top
D17  0603  [LED_0603]  150.27,23.45 0 top
D18  0603  [LED_0603]  150.4,22.18 0 top
D19  B5819W  [SOD-123]  16.25,45.68 180 top
D20  0603  [LED_0603]  16.5,48.73 180 top
D21  TVS  [SPT-23-6]  16.38,41.49 270 top
D22  0603  [LED_0603]  49.27,47.72 0 top
D23  0603  [LED_0603]  49.27,46.45 0 top
D24  0603  [LED_0603]  49.4,45.18 0 top
D25  B5819W  [SOD-123]  66.75,45.68 180 top
D26  0603  [LED_0603]  67,48.73 180 top
D27  TVS  [SPT-23-6]  66.88,41.49 270 top
D28  0603  [LED_0603]  99.77,47.72 0 top
D29  0603  [LED_0603]  99.77,46.45 0 top
D30  0603  [LED_0603]  99.9,45.18 0 top
D31  B5819W  [SOD-123]  117.25,45.68 180 top
D32  0603  [LED_0603]  117.5,48.73 180 top
D33  TVS  [SPT-23-6]  117.38,41.49 270 top
D34  0603  [LED_0603]  150.27,47.72 0 top
D35  0603  [LED_0603]  150.27,46.45 0 top
D36  0603  [LED_0603]  150.4,45.18 0 top
D37  B5819W  [SOD-123]  16.25,68.68 180 top
D38  0603  [LED_0603]  16.5,71.73 180 top
D39  TVS  [SPT-23-6]  16.38,64.49 270 top
D40  0603  [LED_0603]  49.27,70.72 0 top
D41  0603  [LED_0603]  49.27,69.45 0 top
D42  0603  [LED_0603]  49.4,68.18 0 top
D43  B5819W  [SOD-123]  66.75,68.68 180 top
D44  0603  [LED_0603]  67,71.73 180 top
D45  TVS  [SPT-23-6]  66.88,64.49 270 top
D46  0603  [LED_0603]  99.77,70.72 0 top
D47  0603  [LED_0603]  99.77,69.45 0 top
D48  0603  [LED_0603]  99.9,68.18 0 top
D49  B5819W  [SOD-123]  117.25,68.68 180 top
D50  0603  [LED_0603]  117.5,71.73 180 top
D51  TVS  [SPT-23-6]  117.38,64.49 270 top
D52  0603  [LED_0603]  150.27,70.72 0 top
D53  0603  [LED_0603]  150.27,69.45 0 top
D54  0603  [LED_0603]  150.4,68.18 0 top
D55  B5819W  [SOD-123]  16.25,91.68 180 top
D56  0603  [LED_0603]  16.5,94.73 180 top
D57  TVS  [SPT-23-6]  16.38,87.49 270 top
D58  0603  [LED_0603]  49.27,93.72 0 top
D59  0603  [LED_0603]  49.27,92.45 0 top
D60  0603  [LED_0603]  49.4,91.18 0 top
D61  B5819W  [SOD-123]  66.75,91.68 180 top
D62  0603  [LED_0603]  67,94.73 180 top
D63  TVS  [SPT-23-6]  66.88,87.49 270 top
D64  0603  [LED_0603]  99.77,93.72 0 top
D65  0603  [LED_0603]  99.77,92.45 0 top
D66  0603  [LED_0603]  99.9,91.18 0 top
D67  B5819W  [SOD-123]  117.25,91.68 180 top
D68  0603  [LED_0603]  117.5,94.73 180 top
D69  TVS  [SPT-23-6]  117.38,87.49 270 top
D70  0603  [LED_0603]  150.27,93.72 0 top
D71  0603  [LED_0603]  150.27,92.45 0 top
D72  0603  [LED_0603]  150.4,91.18 0 top
D73  B5819W  [SOD-123]  16.25,114.68 180 top
D74  0603  [LED_0603]  16.5,117.73 180 top
D75  TVS  [SPT-23-6]  16.38,110.49 270 top
D76  0603  [LED_0603]  49.27,116.72 0 top
D77  0603  [LED_0603]  49.27,115.45 0 top
D78  0603  [LED_0603]  49.4,114.18 0 top
D79  B5819W  [SOD-123]  66.75,114.68 180 top
D80  0603  [LED_0603]  67,117.73 180 top
D81  TVS  [SPT-23-6]  66.88,110.49 270 top
D82  0603  [LED_0603]  99.77,116.72 0 top
D83  0603  [LED_0603]  99.77,115.45 0 top
D84  0603  [LED_0603]  99.9,114.18 0 top
D85  B5819W  [SOD-123]  117.25,114.68 180 top
D86  0603  [LED_0603]  117.5,117.73 180 top
D87  TVS  [SPT-23-6]  117.38,110.49 270 top
D88  0603  [LED_0603]  150.27,116.72 0 top
D89  0603  [LED_0603]  150.27,115.45 0 top
D90  0603  [LED_0603]  150.4,114.18 0 top
D91  B5819W  [SOD-123]  16.25,137.69 180 top
D92  0603  [LED_0603]  16.5,140.73 180 top
D93  TVS  [SPT-23-6]  16.38,133.49 270 top
D94  0603  [LED_0603]  49.27,139.72 0 top
D95  0603  [LED_0603]  49.27,138.45 0 top
D96  0603  [LED_0603]  49.4,137.18 0 top
D97  B5819W  [SOD-123]  66.75,137.69 180 top
D98  0603  [LED_0603]  67,140.73 180 top
D99  TVS  [SPT-23-6]  66.88,133.49 270 top
D100  0603  [LED_0603]  99.77,139.72 0 top
D101  0603  [LED_0603]  99.77,138.45 0 top
D102  0603  [LED_0603]  99.9,137.18 0 top
D103  B5819W  [SOD-123]  117.25,137.69 180 top
D104  0603  [LED_0603]  117.5,140.73 180 top
D105  TVS  [SPT-23-6]  117.38,133.49 270 top
D106  0603  [LED_0603]  150.27,139.72 0 top
D107  0603  [LED_0603]  150.27,138.45 0 top
D108  0603  [LED_0603]  150.4,137.18 0 top
D109  B5819W  [SOD-123]  16.25,160.69 180 top
D110  0603  [LED_0603]  16.5,163.73 180 top
D111  TVS  [SPT-23-6]  16.38,156.49 270 top
D112  0603  [LED_0603]  49.27,162.72 0 top
D113  0603  [LED_0603]  49.27,161.45 0 top
D114  0603  [LED_0603]  49.4,160.18 0 top
D115  B5819W  [SOD-123]  66.75,160.69 180 top
D116  0603  [LED_0603]  67,163.73 180 top
D117  TVS  [SPT-23-6]  66.88,156.49 270 top
D118  0603  [LED_0603]  99.77,162.72 0 top
D119  0603  [LED_0603]  99.77,161.45 0 top
D120  0603  [LED_0603]  99.9,160.18 0 top
D121  B5819W  [SOD-123]  117.25,160.69 180 top
D122  0603  [LED_0603]  117.5,163.73 180 top
D123  TVS  [SPT-23-6]  117.38,156.49 270 top
D124  0603  [LED_0603]  150.27,162.72 0 top
D125  0603  [LED_0603]  150.27,161.45 0 top
D126  0603  [LED_0603]  150.4,160.18 0 top
D127  B5819W  [SOD-123]  16.25,183.69 180 top
D128  0603  [LED_0603]  16.5,186.73 180 top
D129  TVS  [SPT-23-6]  16.38,179.49 270 top
D130  0603  [LED_0603]  49.27,185.72 0 top
D131  0603  [LED_0603]  49.27,184.45 0 top
D132  0603  [LED_0603]  49.4,183.18 0 top
D133  B5819W  [SOD-123]  66.75,183.69 180 top
D134  0603  [LED_0603]  67,186.73 180 top
D135  TVS  [SPT-23-6]  66.88,179.49 270 top
D136  0603  [LED_0603]  99.77,185.72 0 top
D137  0603  [LED_0603]  99.77,184.45 0 top
D138  0603  [LED_0603]  99.9,183.18 0 top
D139  B5819W  [SOD-123]  117.25,183.69 180 top
D140  0603  [LED_0603]  117.5,186.73 180 top
D141  TVS  [SPT-23-6]  117.38,179.49 270 top
D142  0603  [LED_0603]  150.27,185.72 0 top
D143  0603  [LED_0603]  150.27,184.45 0 top
D144  0603  [LED_0603]  150.4,183.18 0 top
E$1  [FIDUCIAL-1X2]  13.7,194.94 0 top
E$2  [FIDUCIAL-1X2]  13.7,194.94 0 bottom
E$3  [FIDUCIAL-1X2]  150.91,194.94 0 top
E$4  [FIDUCIAL-1X2]  150.91,194.94 0 bottom
E$5  [FIDUCIAL-1.5X3]  13.7,4.76 0 top
E$6  [FIDUCIAL-1.5X3]  13.7,4.76 0 bottom
J1  USB-A_PTH_MALE  [USB-A-H-RECT]  9.64,19.35 0 top
J2  USB-A_PTH_MALE  [USB-A-H-RECT]  60.14,19.35 0 top
J3  USB-A_PTH_MALE  [USB-A-H-RECT]  110.64,19.35 0 top
J4  USB-A_PTH_MALE  [USB-A-H-RECT]  9.64,42.35 0 top
J5  USB-A_PTH_MALE  [USB-A-H-RECT]  60.14,42.35 0 top
J6  USB-A_PTH_MALE  [USB-A-H-RECT]  110.64,42.35 0 top
J7  USB-A_PTH_MALE  [USB-A-H-RECT]  9.64,65.35 0 top
J8  USB-A_PTH_MALE  [USB-A-H-RECT]  60.14,65.35 0 top
J9  USB-A_PTH_MALE  [USB-A-H-RECT]  110.64,65.35 0 top
J10  USB-A_PTH_MALE  [USB-A-H-RECT]  9.64,88.35 0 top
J11  USB-A_PTH_MALE  [USB-A-H-RECT]  60.14,88.35 0 top
J12  USB-A_PTH_MALE  [USB-A-H-RECT]  110.64,88.35 0 top
J13  USB-A_PTH_MALE  [USB-A-H-RECT]  9.64,111.35 0 top
J14  USB-A_PTH_MALE  [USB-A-H-RECT]  60.14,111.35 0 top
J15  USB-A_PTH_MALE  [USB-A-H-RECT]  110.64,111.35 0 top
J16  USB-A_PTH_MALE  [USB-A-H-RECT]  9.64,134.35 0 top
J17  USB-A_PTH_MALE  [USB-A-H-RECT]  60.14,134.35 0 top
J18  USB-A_PTH_MALE  [USB-A-H-RECT]  110.64,134.35 0 top
J19  USB-A_PTH_MALE  [USB-A-H-RECT]  9.64,157.35 0 top
J20  USB-A_PTH_MALE  [USB-A-H-RECT]  60.14,157.35 0 top
J21  USB-A_PTH_MALE  [USB-A-H-RECT]  110.64,157.35 0 top
J22  USB-A_PTH_MALE  [USB-A-H-RECT]  9.64,180.35 0 top
J23  USB-A_PTH_MALE  [USB-A-H-RECT]  60.14,180.35 0 top
J24  USB-A_PTH_MALE  [USB-A-H-RECT]  110.64,180.35 0 top
JP1  V G Rx Tx  [1X04/90]  8.37,19.35 90 top
JP2  V G Rx Tx  [1X04/90]  58.87,19.35 90 top
JP3  V G Rx Tx  [1X04/90]  109.37,19.35 90 top
JP4  V G Rx Tx  [1X04/90]  8.37,42.35 90 top
JP5  V G Rx Tx  [1X04/90]  58.87,42.35 90 top
JP6  V G Rx Tx  [1X04/90]  109.37,42.35 90 top
JP7  V G Rx Tx  [1X04/90]  8.37,65.35 90 top
JP8  V G Rx Tx  [1X04/90]  58.87,65.35 90 top
JP9  V G Rx Tx  [1X04/90]  109.37,65.35 90 top
JP10  V G Rx Tx  [1X04/90]  8.37,88.35 90 top
JP11  V G Rx Tx  [1X04/90]  58.87,88.35 90 top
JP12  V G Rx Tx  [1X04/90]  109.37,88.35 90 top
JP13  V G Rx Tx  [1X04/90]  8.37,111.35 90 top
JP14  V G Rx Tx  [1X04/90]  58.87,111.35 90 top
JP15  V G Rx Tx  [1X04/90]  109.37,111.35 90 top
JP16  V G Rx Tx  [1X04/90]  8.37,134.35 90 top
JP17  V G Rx Tx  [1X04/90]  58.87,134.35 90 top
JP18  V G Rx Tx  [1X04/90]  109.37,134.35 90 top
JP19  V G Rx Tx  [1X04/90]  8.37,157.35 90 top
JP20  V G Rx Tx  [1X04/90]  58.87,157.35 90 top
JP21  V G Rx Tx  [1X04/90]  109.37,157.35 90 top
JP22  V G Rx Tx  [1X04/90]  8.37,180.35 90 top
JP23  V G Rx Tx  [1X04/90]  58.87,180.35 90 top
JP24  V G Rx Tx  [1X04/90]  109.37,180.35 90 top
L1  [R0402]  40.38,17.35 0 top
L2  [R0402]  90.88,17.35 0 top
L3  [R0402]  141.38,17.35 0 top
L4  [R0402]  40.38,40.35 0 top
L5  [R0402]  90.88,40.35 0 top
L6  [R0402]  141.38,40.35 0 top
L7  [R0402]  40.38,63.35 0 top
L8  [R0402]  90.88,63.35 0 top
L9  [R0402]  141.38,63.35 0 top
L10  [R0402]  40.38,86.35 0 top
L11  [R0402]  90.88,86.35 0 top
L12  [R0402]  141.38,86.35 0 top
L13  [R0402]  40.38,109.35 0 top
L14  [R0402]  90.88,109.35 0 top
L15  [R0402]  141.38,109.35 0 top
L16  [R0402]  40.38,132.35 0 top
L17  [R0402]  90.88,132.35 0 top
L18  [R0402]  141.38,132.35 0 top
L19  [R0402]  40.38,155.35 0 top
L20  [R0402]  90.88,155.35 0 top
L21  [R0402]  141.38,155.35 0 top
L22  [R0402]  40.38,178.35 0 top
L23  [R0402]  90.88,178.35 0 top
L24  [R0402]  141.38,178.35 0 top
R1  10k  [R0402]  16.5,24.46 0 top
R2  10k  [R0402]  26.28,11.89 180 top
R3  10k  [R0402]  51.68,24.72 0 top
R4  10k  [R0402]  51.68,23.45 0 top
R5  10k  [R0402]  51.68,22.18 0 top
R6  10k  [R0402]  76.78,11.89 180 top
R7  10k  [R0402]  67,24.46 0 top
R8  10k  [R0402]  102.18,24.72 0 top
R9  10k  [R0402]  102.18,23.45 0 top
R10  10k  [R0402]  102.18,22.18 0 top
R11  10k  [R0402]  127.28,11.89 180 top
R12  10k  [R0402]  117.5,24.46 0 top
R13  10k  [R0402]  152.68,24.72 0 top
R14  10k  [R0402]  152.68,23.45 0 top
R15  10k  [R0402]  152.68,22.18 0 top
R16  10k  [R0402]  26.28,34.89 180 top
R17  10k  [R0402]  16.5,47.46 0 top
R18  10k  [R0402]  51.68,47.72 0 top
R19  10k  [R0402]  51.68,46.45 0 top
R20  10k  [R0402]  51.68,45.18 0 top
R21  10k  [R0402]  76.78,34.89 180 top
R22  10k  [R0402]  67,47.46 0 top
R23  10k  [R0402]  102.18,47.72 0 top
R24  10k  [R0402]  102.18,46.45 0 top
R25  10k  [R0402]  102.18,45.18 0 top
R26  10k  [R0402]  127.28,34.89 180 top
R27  10k  [R0402]  117.5,47.46 0 top
R28  10k  [R0402]  152.68,47.72 0 top
R29  10k  [R0402]  152.68,46.45 0 top
R30  10k  [R0402]  152.68,45.18 0 top
R31  10k  [R0402]  26.28,57.89 180 top
R32  10k  [R0402]  16.5,70.46 0 top
R33  10k  [R0402]  51.68,70.72 0 top
R34  10k  [R0402]  51.68,69.45 0 top
R35  10k  [R0402]  51.68,68.18 0 top
R36  10k  [R0402]  76.78,57.89 180 top
R37  10k  [R0402]  67,70.46 0 top
R38  10k  [R0402]  102.18,70.72 0 top
R39  10k  [R0402]  102.18,69.45 0 top
R40  10k  [R0402]  102.18,68.18 0 top
R41  10k  [R0402]  127.28,57.89 180 top
R42  10k  [R0402]  117.5,70.46 0 top
R43  10k  [R0402]  152.68,70.72 0 top
R44  10k  [R0402]  152.68,69.45 0 top
R45  10k  [R0402]  152.68,68.18 0 top
R46  10k  [R0402]  26.28,80.89 180 top
R47  10k  [R0402]  16.5,93.46 0 top
R48  10k  [R0402]  51.68,93.72 0 top
R49  10k  [R0402]  51.68,92.45 0 top
R50  10k  [R0402]  51.68,91.18 0 top
R51  10k  [R0402]  76.78,80.89 180 top
R52  10k  [R0402]  67,93.46 0 top
R53  10k  [R0402]  102.18,93.72 0 top
R54  10k  [R0402]  102.18,92.45 0 top
R55  10k  [R0402]  102.18,91.18 0 top
R56  10k  [R0402]  127.28,80.89 180 top
R57  10k  [R0402]  117.5,93.46 0 top
R58  10k  [R0402]  152.68,93.72 0 top
R59  10k  [R0402]  152.68,92.45 0 top
R60  10k  [R0402]  152.68,91.18 0 top
R61  10k  [R0402]  26.28,103.89 180 top
R62  10k  [R0402]  16.5,116.46 0 top
R63  10k  [R0402]  51.68,116.72 0 top
R64  10k  [R0402]  51.68,115.45 0 top
R65  10k  [R0402]  51.68,114.18 0 top
R66  10k  [R0402]  76.78,103.89 180 top
R67  10k  [R0402]  67,116.46 0 top
R68  10k  [R0402]  102.18,116.72 0 top
R69  10k  [R0402]  102.18,115.45 0 top
R70  10k  [R0402]  102.18,114.18 0 top
R71  10k  [R0402]  127.28,103.89 180 top
R72  10k  [R0402]  117.5,116.46 0 top
R73  10k  [R0402]  152.68,116.72 0 top
R74  10k  [R0402]  152.68,115.45 0 top
R75  10k  [R0402]  152.68,114.18 0 top
R76  10k  [R0402]  26.28,126.89 180 top
R77  10k  [R0402]  16.5,139.46 0 top
R78  10k  [R0402]  51.68,139.72 0 top
R79  10k  [R0402]  51.68,138.45 0 top
R80  10k  [R0402]  51.68,137.18 0 top
R81  10k  [R0402]  76.78,126.89 180 top
R82  10k  [R0402]  67,139.46 0 top
R83  10k  [R0402]  102.18,139.72 0 top
R84  10k  [R0402]  102.18,138.45 0 top
R85  10k  [R0402]  102.18,137.18 0 top
R86  10k  [R0402]  127.28,126.89 180 top
R87  10k  [R0402]  117.5,139.46 0 top
R88  10k  [R0402]  152.68,139.72 0 top
R89  10k  [R0402]  152.68,138.45 0 top
R90  10k  [R0402]  152.68,137.18 0 top
R91  10k  [R0402]  26.28,149.89 180 top
R92  10k  [R0402]  16.5,162.46 0 top
R93  10k  [R0402]  51.68,162.72 0 top
R94  10k  [R0402]  51.68,161.45 0 top
R95  10k  [R0402]  51.68,160.18 0 top
R96  10k  [R0402]  76.78,149.89 180 top
R97  10k  [R0402]  67,162.46 0 top
R98  10k  [R0402]  102.18,162.72 0 top
R99  10k  [R0402]  102.18,161.45 0 top
R100  10k  [R0402]  102.18,160.18 0 top
R101  10k  [R0402]  127.28,149.89 180 top
R102  10k  [R0402]  117.5,162.46 0 top
R103  10k  [R0402]  152.68,162.72 0 top
R104  10k  [R0402]  152.68,161.45 0 top
R105  10k  [R0402]  152.68,160.18 0 top
R106  10k  [R0402]  26.28,172.89 180 top
R107  10k  [R0402]  16.5,185.46 0 top
R108  10k  [R0402]  51.68,185.72 0 top
R109  10k  [R0402]  51.68,184.45 0 top
R110  10k  [R0402]  51.68,183.18 0 top
R111  10k  [R0402]  76.78,172.89 180 top
R112  10k  [R0402]  67,185.46 0 top
R113  10k  [R0402]  102.18,185.72 0 top
R114  10k  [R0402]  102.18,184.45 0 top
R115  10k  [R0402]  102.18,183.18 0 top
R116  10k  [R0402]  127.28,172.89 180 top
R117  10k  [R0402]  117.5,185.46 0 top
R118  10k  [R0402]  152.68,185.72 0 top
R119  10k  [R0402]  152.68,184.45 0 top
R120  10k  [R0402]  152.68,183.18 0 top
S1  SPST-3x4mm  [TACTILE_SWITCH_SMD_3.0X4.0MM]  26.28,14.05 180 top
S2  SPST-3x4mm  [TACTILE_SWITCH_SMD_3.0X4.0MM]  76.78,14.05 180 top
S3  SPST-3x4mm  [TACTILE_SWITCH_SMD_3.0X4.0MM]  127.28,14.05 180 top
S4  SPST-3x4mm  [TACTILE_SWITCH_SMD_3.0X4.0MM]  26.28,37.05 180 top
S5  SPST-3x4mm  [TACTILE_SWITCH_SMD_3.0X4.0MM]  76.78,37.05 180 top
S6  SPST-3x4mm  [TACTILE_SWITCH_SMD_3.0X4.0MM]  127.28,37.05 180 top
S7  SPST-3x4mm  [TACTILE_SWITCH_SMD_3.0X4.0MM]  26.28,60.05 180 top
S8  SPST-3x4mm  [TACTILE_SWITCH_SMD_3.0X4.0MM]  76.78,60.05 180 top
S9  SPST-3x4mm  [TACTILE_SWITCH_SMD_3.0X4.0MM]  127.28,60.05 180 top
S10  SPST-3x4mm  [TACTILE_SWITCH_SMD_3.0X4.0MM]  26.28,83.05 180 top
S11  SPST-3x4mm  [TACTILE_SWITCH_SMD_3.0X4.0MM]  76.78,83.05 180 top
S12  SPST-3x4mm  [TACTILE_SWITCH_SMD_3.0X4.0MM]  127.28,83.05 180 top
S13  SPST-3x4mm  [TACTILE_SWITCH_SMD_3.0X4.0MM]  26.28,106.05 180 top
S14  SPST-3x4mm  [TACTILE_SWITCH_SMD_3.0X4.0MM]  76.78,106.05 180 top
S15  SPST-3x4mm  [TACTILE_SWITCH_SMD_3.0X4.0MM]  127.28,106.05 180 top
S16  SPST-3x4mm  [TACTILE_SWITCH_SMD_3.0X4.0MM]  26.28,129.05 180 top
S17  SPST-3x4mm  [TACTILE_SWITCH_SMD_3.0X4.0MM]  76.78,129.05 180 top
S18  SPST-3x4mm  [TACTILE_SWITCH_SMD_3.0X4.0MM]  127.28,129.05 180 top
S19  SPST-3x4mm  [TACTILE_SWITCH_SMD_3.0X4.0MM]  26.28,152.05 180 top
S20  SPST-3x4mm  [TACTILE_SWITCH_SMD_3.0X4.0MM]  76.78,152.05 180 top
S21  SPST-3x4mm  [TACTILE_SWITCH_SMD_3.0X4.0MM]  127.28,152.05 180 top
S22  SPST-3x4mm  [TACTILE_SWITCH_SMD_3.0X4.0MM]  26.28,175.05 180 top
S23  SPST-3x4mm  [TACTILE_SWITCH_SMD_3.0X4.0MM]  76.78,175.05 180 top
S24  SPST-3x4mm  [TACTILE_SWITCH_SMD_3.0X4.0MM]  127.28,175.05 180 top
TC1  TC2030-IDC-NL  [TC2030-IDC-NL]  37.71,11.89 180 top
TC2  TC2030-IDC-NL  [TC2030-IDC-NL]  88.21,11.89 180 top
TC3  TC2030-IDC-NL  [TC2030-IDC-NL]  138.71,11.89 180 top
TC4  TC2030-IDC-NL  [TC2030-IDC-NL]  37.71,34.89 180 top
TC5  TC2030-IDC-NL  [TC2030-IDC-NL]  88.21,34.89 180 top
TC6  TC2030-IDC-NL  [TC2030-IDC-NL]  138.71,34.89 180 top
TC7  TC2030-IDC-NL  [TC2030-IDC-NL]  37.71,57.89 180 top
TC8  TC2030-IDC-NL  [TC2030-IDC-NL]  88.21,57.89 180 top
TC9  TC2030-IDC-NL  [TC2030-IDC-NL]  138.71,57.89 180 top
TC10  TC2030-IDC-NL  [TC2030-IDC-NL]  37.71,80.89 180 top
TC11  TC2030-IDC-NL  [TC2030-IDC-NL]  88.21,80.89 180 top
TC12  TC2030-IDC-NL  [TC2030-IDC-NL]  138.71,80.89 180 top
TC13  TC2030-IDC-NL  [TC2030-IDC-NL]  37.71,103.89 180 top
TC14  TC2030-IDC-NL  [TC2030-IDC-NL]  88.21,103.89 180 top
TC15  TC2030-IDC-NL  [TC2030-IDC-NL]  138.71,103.89 180 top
TC16  TC2030-IDC-NL  [TC2030-IDC-NL]  37.71,126.89 180 top
TC17  TC2030-IDC-NL  [TC2030-IDC-NL]  88.21,126.89 180 top
TC18  TC2030-IDC-NL  [TC2030-IDC-NL]  138.71,126.89 180 top
TC19  TC2030-IDC-NL  [TC2030-IDC-NL]  37.71,149.89 180 top
TC20  TC2030-IDC-NL  [TC2030-IDC-NL]  88.21,149.89 180 top
TC21  TC2030-IDC-NL  [TC2030-IDC-NL]  138.71,149.89 180 top
TC22  TC2030-IDC-NL  [TC2030-IDC-NL]  37.71,172.89 180 top
TC23  TC2030-IDC-NL  [TC2030-IDC-NL]  88.21,172.89 180 top
TC24  TC2030-IDC-NL  [TC2030-IDC-NL]  138.71,172.89 180 top
TP1  TEST-POINT-3  [PAD-3X-RECT-SILK]  50.41,13.79 180 top
TP2  TEST-POINT-3  [PAD-3X-RECT-SILK]  100.91,13.79 180 top
TP3  TEST-POINT-3  [PAD-3X-RECT-SILK]  151.41,13.79 180 top
TP4  TEST-POINT-3  [PAD-3X-RECT-SILK]  50.41,36.79 180 top
TP5  TEST-POINT-3  [PAD-3X-RECT-SILK]  100.91,36.79 180 top
TP6  TEST-POINT-3  [PAD-3X-RECT-SILK]  151.41,36.79 180 top
TP7  TEST-POINT-3  [PAD-3X-RECT-SILK]  50.41,59.79 180 top
TP8  TEST-POINT-3  [PAD-3X-RECT-SILK]  100.91,59.79 180 top
TP9  TEST-POINT-3  [PAD-3X-RECT-SILK]  151.41,59.79 180 top
TP10  TEST-POINT-3  [PAD-3X-RECT-SILK]  50.41,82.79 180 top
TP11  TEST-POINT-3  [PAD-3X-RECT-SILK]  100.91,82.79 180 top
TP12  TEST-POINT-3  [PAD-3X-RECT-SILK]  151.41,82.79 180 top
TP13  TEST-POINT-3  [PAD-3X-RECT-SILK]  50.41,105.79 180 top
TP14  TEST-POINT-3  [PAD-3X-RECT-SILK]  100.91,105.79 180 top
TP15  TEST-POINT-3  [PAD-3X-RECT-SILK]  151.41,105.79 180 top
TP16  TEST-POINT-3  [PAD-3X-RECT-SILK]  50.41,128.8 180 top
TP17  TEST-POINT-3  [PAD-3X-RECT-SILK]  100.91,128.8 180 top
TP18  TEST-POINT-3  [PAD-3X-RECT-SILK]  151.41,128.8 180 top
TP19  TEST-POINT-3  [PAD-3X-RECT-SILK]  50.41,151.8 180 top
TP20  TEST-POINT-3  [PAD-3X-RECT-SILK]  100.91,151.8 180 top
TP21  TEST-POINT-3  [PAD-3X-RECT-SILK]  151.41,151.8 180 top
TP22  TEST-POINT-3  [PAD-3X-RECT-SILK]  50.41,174.8 180 top
TP23  TEST-POINT-3  [PAD-3X-RECT-SILK]  100.91,174.8 180 top
TP24  TEST-POINT-3  [PAD-3X-RECT-SILK]  151.41,174.8 180 top
U1  CH340E  [MSOP-10]  16.88,13.03 270 top
U2  NRF52832  [QFN40P600X600X90-49T450N]  34.03,17.99 0 top
U3  NRF52832  [QFN40P600X600X90-49T450N]  84.53,17.99 0 top
U4  CH340E  [MSOP-10]  67.38,13.03 270 top
U5  NRF52832  [QFN40P600X600X90-49T450N]  135.03,17.99 0 top
U6  CH340E  [MSOP-10]  117.88,13.03 270 top
U7  NRF52832  [QFN40P600X600X90-49T450N]  34.03,40.99 0 top
U8  CH340E  [MSOP-10]  16.88,36.03 270 top
U9  NRF52832  [QFN40P600X600X90-49T450N]  84.53,40.99 0 top
U10  CH340E  [MSOP-10]  67.38,36.03 270 top
U11  NRF52832  [QFN40P600X600X90-49T450N]  135.03,40.99 0 top
U12  CH340E  [MSOP-10]  117.88,36.03 270 top
U13  NRF52832  [QFN40P600X600X90-49T450N]  34.03,63.99 0 top
U14  CH340E  [MSOP-10]  16.88,59.03 270 top
U15  NRF52832  [QFN40P600X600X90-49T450N]  84.53,63.99 0 top
U16  CH340E  [MSOP-10]  67.38,59.03 270 top
U17  NRF52832  [QFN40P600X600X90-49T450N]  135.03,63.99 0 top
U18  CH340E  [MSOP-10]  117.88,59.03 270 top
U19  NRF52832  [QFN40P600X600X90-49T450N]  34.03,86.98 0 top
U20  CH340E  [MSOP-10]  16.88,82.03 270 top
U21  NRF52832  [QFN40P600X600X90-49T450N]  84.53,86.98 0 top
U22  CH340E  [MSOP-10]  67.38,82.03 270 top
U23  NRF52832  [QFN40P600X600X90-49T450N]  135.03,86.98 0 top
U24  CH340E  [MSOP-10]  117.88,82.03 270 top
U25  NRF52832  [QFN40P600X600X90-49T450N]  34.03,109.98 0 top
U26  CH340E  [MSOP-10]  16.88,105.03 270 top
U27  NRF52832  [QFN40P600X600X90-49T450N]  84.53,109.98 0 top
U28  CH340E  [MSOP-10]  67.38,105.03 270 top
U29  NRF52832  [QFN40P600X600X90-49T450N]  135.03,109.98 0 top
U30  CH340E  [MSOP-10]  117.88,105.03 270 top
U31  NRF52832  [QFN40P600X600X90-49T450N]  34.03,132.99 0 top
U32  CH340E  [MSOP-10]  16.88,128.03 270 top
U33  NRF52832  [QFN40P600X600X90-49T450N]  84.53,132.99 0 top
U34  CH340E  [MSOP-10]  67.38,128.03 270 top
U35  NRF52832  [QFN40P600X600X90-49T450N]  135.03,132.99 0 top
U36  CH340E  [MSOP-10]  117.88,128.03 270 top
U37  NRF52832  [QFN40P600X600X90-49T450N]  34.03,155.99 0 top
U38  CH340E  [MSOP-10]  16.88,151.03 270 top
U39  NRF52832  [QFN40P600X600X90-49T450N]  84.53,155.99 0 top
U40  CH340E  [MSOP-10]  67.38,151.03 270 top
U41  NRF52832  [QFN40P600X600X90-49T450N]  135.03,155.99 0 top
U42  CH340E  [MSOP-10]  117.88,151.03 270 top
U43  NRF52832  [QFN40P600X600X90-49T450N]  34.03,178.99 0 top
U44  CH340E  [MSOP-10]  16.88,174.03 270 top
U45  NRF52832  [QFN40P600X600X90-49T450N]  84.53,178.99 0 top
U46  CH340E  [MSOP-10]  67.38,174.03 270 top
U47  NRF52832  [QFN40P600X600X90-49T450N]  135.03,178.99 0 top
U48  CH340E  [MSOP-10]  117.88,174.03 270 top
VR1  AP2210K-3.3TRG  [SOT-23-5]  21.71,23.45 270 top
VR2  AP2210K-3.3TRG  [SOT-23-5]  72.21,23.45 270 top
VR3  AP2210K-3.3TRG  [SOT-23-5]  122.71,23.45 270 top
VR4  AP2210K-3.3TRG  [SOT-23-5]  21.71,46.45 270 top
VR5  AP2210K-3.3TRG  [SOT-23-5]  72.21,46.45 270 top
VR6  AP2210K-3.3TRG  [SOT-23-5]  122.71,46.45 270 top
VR7  AP2210K-3.3TRG  [SOT-23-5]  21.71,69.45 270 top
VR8  AP2210K-3.3TRG  [SOT-23-5]  72.21,69.45 270 top
VR9  AP2210K-3.3TRG  [SOT-23-5]  122.71,69.45 270 top
VR10  AP2210K-3.3TRG  [SOT-23-5]  21.71,92.45 270 top
VR11  AP2210K-3.3TRG  [SOT-23-5]  72.21,92.45 270 top
VR12  AP2210K-3.3TRG  [SOT-23-5]  122.71,92.45 270 top
VR13  AP2210K-3.3TRG  [SOT-23-5]  21.71,115.45 270 top
VR14  AP2210K-3.3TRG  [SOT-23-5]  72.21,115.45 270 top
VR15  AP2210K-3.3TRG  [SOT-23-5]  122.71,115.45 270 top
VR16  AP2210K-3.3TRG  [SOT-23-5]  21.71,138.45 270 top
VR17  AP2210K-3.3TRG  [SOT-23-5]  72.21,138.45 270 top
VR18  AP2210K-3.3TRG  [SOT-23-5]  122.71,138.45 270 top
VR19  AP2210K-3.3TRG  [SOT-23-5]  21.71,161.45 270 top
VR20  AP2210K-3.3TRG  [SOT-23-5]  72.21,161.45 270 top
VR21  AP2210K-3.3TRG  [SOT-23-5]  122.71,161.45 270 top
VR22  AP2210K-3.3TRG  [SOT-23-5]  21.71,184.45 270 top
VR23  AP2210K-3.3TRG  [SOT-23-5]  72.21,184.45 270 top
VR24  AP2210K-3.3TRG  [SOT-23-5]  122.71,184.45 270 top
Y1  32MHz_2016  [CRYSTAL-SMD-2.0X1.6MM]  39.24,21.54 90 top
Y2  32.768kHz  [CRYSTAL-SMD-3.2X1.5MM]  28.19,20.78 90 top
Y3  32.768kHz  [CRYSTAL-SMD-3.2X1.5MM]  78.69,20.78 90 top
Y4  32MHz_2016  [CRYSTAL-SMD-2.0X1.6MM]  89.74,21.54 90 top
Y5  32.768kHz  [CRYSTAL-SMD-3.2X1.5MM]  129.19,20.78 90 top
Y6  32MHz_2016  [CRYSTAL-SMD-2.0X1.6MM]  140.24,21.54 90 top
Y7  32.768kHz  [CRYSTAL-SMD-3.2X1.5MM]  28.19,43.78 90 top
Y8  32MHz_2016  [CRYSTAL-SMD-2.0X1.6MM]  39.24,44.54 90 top
Y9  32.768kHz  [CRYSTAL-SMD-3.2X1.5MM]  78.69,43.78 90 top
Y10  32MHz_2016  [CRYSTAL-SMD-2.0X1.6MM]  89.74,44.54 90 top
Y11  32.768kHz  [CRYSTAL-SMD-3.2X1.5MM]  129.19,43.78 90 top
Y12  32MHz_2016  [CRYSTAL-SMD-2.0X1.6MM]  140.24,44.54 90 top
Y13  32.768kHz  [CRYSTAL-SMD-3.2X1.5MM]  28.19,66.78 90 top
Y14  32MHz_2016  [CRYSTAL-SMD-2.0X1.6MM]  39.24,67.54 90 top
Y15  32.768kHz  [CRYSTAL-SMD-3.2X1.5MM]  78.69,66.78 90 top
Y16  32MHz_2016  [CRYSTAL-SMD-2.0X1.6MM]  89.74,67.54 90 top
Y17  32.768kHz  [CRYSTAL-SMD-3.2X1.5MM]  129.19,66.78 90 top
Y18  32MHz_2016  [CRYSTAL-SMD-2.0X1.6MM]  140.24,67.54 90 top
Y19  32.768kHz  [CRYSTAL-SMD-3.2X1.5MM]  28.19,89.78 90 top
Y20  32MHz_2016  [CRYSTAL-SMD-2.0X1.6MM]  39.24,90.54 90 top
Y21  32.768kHz  [CRYSTAL-SMD-3.2X1.5MM]  78.69,89.78 90 top
Y22  32MHz_2016  [CRYSTAL-SMD-2.0X1.6MM]  89.74,90.54 90 top
Y23  32.768kHz  [CRYSTAL-SMD-3.2X1.5MM]  129.19,89.78 90 top
Y24  32MHz_2016  [CRYSTAL-SMD-2.0X1.6MM]  140.24,90.54 90 top
Y25  32.768kHz  [CRYSTAL-SMD-3.2X1.5MM]  28.19,112.78 90 top
Y26  32MHz_2016  [CRYSTAL-SMD-2.0X1.6MM]  39.24,113.54 90 top
Y27  32.768kHz  [CRYSTAL-SMD-3.2X1.5MM]  78.69,112.78 90 top
Y28  32MHz_2016  [CRYSTAL-SMD-2.0X1.6MM]  89.74,113.54 90 top
Y29  32.768kHz  [CRYSTAL-SMD-3.2X1.5MM]  129.19,112.78 90 top
Y30  32MHz_2016  [CRYSTAL-SMD-2.0X1.6MM]  140.24,113.54 90 top
Y31  32.768kHz  [CRYSTAL-SMD-3.2X1.5MM]  28.19,135.78 90 top
Y32  32MHz_2016  [CRYSTAL-SMD-2.0X1.6MM]  39.24,136.54 90 top
Y33  32.768kHz  [CRYSTAL-SMD-3.2X1.5MM]  78.69,135.78 90 top
Y34  32MHz_2016  [CRYSTAL-SMD-2.0X1.6MM]  89.74,136.54 90 top
Y35  32.768kHz  [CRYSTAL-SMD-3.2X1.5MM]  129.19,135.78 90 top
Y36  32MHz_2016  [CRYSTAL-SMD-2.0X1.6MM]  140.24,136.54 90 top
Y37  32.768kHz  [CRYSTAL-SMD-3.2X1.5MM]  28.19,158.78 90 top
Y38  32MHz_2016  [CRYSTAL-SMD-2.0X1.6MM]  39.24,159.54 90 top
Y39  32.768kHz  [CRYSTAL-SMD-3.2X1.5MM]  78.69,158.78 90 top
Y40  32MHz_2016  [CRYSTAL-SMD-2.0X1.6MM]  89.74,159.54 90 top
Y41  32.768kHz  [CRYSTAL-SMD-3.2X1.5MM]  129.19,158.78 90 top
Y42  32MHz_2016  [CRYSTAL-SMD-2.0X1.6MM]  140.24,159.54 90 top
Y43  32.768kHz  [CRYSTAL-SMD-3.2X1.5MM]  28.19,181.78 90 top
Y44  32MHz_2016  [CRYSTAL-SMD-2.0X1.6MM]  39.24,182.54 90 top
Y45  32.768kHz  [CRYSTAL-SMD-3.2X1.5MM]  78.69,181.78 90 top
Y46  32MHz_2016  [CRYSTAL-SMD-2.0X1.6MM]  89.74,182.54 90 top
Y47  32.768kHz  [CRYSTAL-SMD-3.2X1.5MM]  129.19,181.78 90 top
Y48  32MHz_2016  [CRYSTAL-SMD-2.0X1.6MM]  140.24,182.54 90 top

## Library data of the parts
C1 C14 C18 C33 C35 C50 C52 C67 C69 C84 C86 C101 C103 C118 C120 C135 C137 C152 C154 C169 C171 C186 C188 C203 C205 C220 C222 C237 C239 C254 C256 C271 C273 C288 C290 C305 C307 C322 C324 C339 C341 C356 C358 C373 C375 C390 C392 C407 = angrypig7-RCL; LCSC: C52923; SPICEPREFIX: C
C2 C20 C37 C54 C71 C88 C105 C122 C139 C156 C173 C190 C207 C224 C241 C258 C275 C292 C309 C326 C343 C360 C377 C394 = angrypig7-RCL; LCSC: C23630; SPICEPREFIX: C
C3 C4 C9 C10 C12 C15-C17 C19 C23 C25-C27 C31 C32 C34 C36 C40 C42-C44 C48 C49 C51 C53 C57 C59-C61 C65 C66 C68 C70 C74 C76-C78 C82 C83 C85 C87 C91 C93-C95 C99 C100 C102 C104 C108 C110-C112 C116 C117 C119 C121 C125 C127-C129 C133 C134 C136 C138 C142 C144-C146 C150 C151 C153 C155 C159 C161-C163 C167 C168 C170 C172 C176 C178-C180 C184 C185 C187 C189 C193 C195-C197 C201 C202 C204 C206 C210 C212-C214 C218 C219 C221 C223 C227 C229-C231 C235 C236 C238 C240 C244 C246-C248 C252 C253 C255 C257 C261 C263-C265 C269 C270 C272 C274 C278 C280-C282 C286 C287 C289 C291 C295 C297-C299 C303 C304 C306 C308 C312 C314-C316 C320 C321 C323 C325 C329 C331-C333 C337 C338 C340 C342 C346 C348-C350 C354 C355 C357 C359 C363 C365-C367 C371 C372 C374 C376 C380 C382-C384 C388 C389 C391 C393 C397 C399-C401 C405 C406 C408 = angrypig7-RCL; LCSC: C1525; SPICEPREFIX: C
C5 C24 C41 C58 C75 C92 C109 C126 C143 C160 C177 C194 C211 C228 C245 C262 C279 C296 C313 C330 C347 C364 C381 C398 = angrypig7-RCL; LCSC: C23733; SPICEPREFIX: C
C6-C8 C11 C21 C22 C28 C29 C38 C39 C45 C46 C55 C56 C62 C63 C72 C73 C79 C80 C89 C90 C96 C97 C106 C107 C113 C114 C123 C124 C130 C131 C140 C141 C147 C148 C157 C158 C164 C165 C174 C175 C181 C182 C191 C192 C198 C199 C208 C209 C215 C216 C225 C226 C232 C233 C242 C243 C249 C250 C259 C260 C266 C267 C276 C277 C283 C284 C293 C294 C300 C301 C310 C311 C317 C318 C327 C328 C334 C335 C344 C345 C351 C352 C361 C362 C368 C369 C378 C379 C385 C386 C395 C396 C402 C403 = angrypig7-RCL; LCSC: C1547; SPICEPREFIX: C
C13 C30 C47 C64 C81 C98 C115 C132 C149 C166 C183 C200 C217 C234 C251 C268 C285 C302 C319 C336 C353 C370 C387 C404 = angrypig7-RCL; LCSC: C1546; SPICEPREFIX: C
D1 D7 D13 D19 D25 D31 D37 D43 D49 D55 D61 D67 D73 D79 D85 D91 D97 D103 D109 D115 D121 D127 D133 D139 = angrypig7-Diodes; LCSC: C8598
D2 D9 D15 D21 D27 D33 D39 D45 D51 D57 D63 D69 D75 D81 D87 D93 D99 D105 D111 D117 D123 D129 D135 D141 = angrypig7-Diodes; LCSC: C85364
D3-D6 D8 D10-D12 D14 D16-D18 D20 D22-D24 D26 D28-D30 D32 D34-D36 D38 D40-D42 D44 D46-D48 D50 D52-D54 D56 D58-D60 D62 D64-D66 D68 D70-D72 D74 D76-D78 D80 D82-D84 D86 D88-D90 D92 D94-D96 D98 D100-D102 D104 D106-D108 D110 D112-D114 D116 D118-D120 D122 D124-D126 D128 D130-D132 D134 D136-D138 D140 D142-D144 = angrypig7-Diodes
E$1-E$4 = SparkFun-Aesthetics
E$5 E$6 = SparkFun-Retired
J1-J24 = angrypig7-Connectors-USB; LCSC: C98125
JP1-JP24 = angrypig7-Connectors-PinHeads
L1-L24 = angrypig7-RCL
R1-R120 = angrypig7-RCL; LCSC: C25744; SPICEPREFIX: R
S1-S24 = angrypig7-Switches; LCSC: C720477
TC1-TC24 = angrypig7-Connectors-Programming
TP1-TP24 = angrypig7-Tests
U1 U4 U6 U8 U10 U12 U14 U16 U18 U20 U22 U24 U26 U28 U30 U32 U34 U36 U38 U40 U42 U44 U46 U48 = angrypig7-IC; LCSC: C99652
U2 U3 U5 U7 U9 U11 U13 U15 U17 U19 U21 U23 U25 U27 U29 U31 U33 U35 U37 U39 U41 U43 U45 U47 = angrypig7-IC-MCU; LCSC: C77540
VR1-VR24 = angrypig7-IC-Power; LCSC: C176959
Y1 Y4 Y6 Y8 Y10 Y12 Y14 Y16 Y18 Y20 Y22 Y24 Y26 Y28 Y30 Y32 Y34 Y36 Y38 Y40 Y42 Y44 Y46 Y48 = angrypig7-Clocks; LCSC: C255896
Y2 Y3 Y5 Y7 Y9 Y11 Y13 Y15 Y17 Y19 Y21 Y23 Y25 Y27 Y29 Y31 Y33 Y35 Y37 Y39 Y41 Y43 Y45 Y47 = angrypig7-Clocks; LCSC: C32346